# Altium PCB AFE_mezzanine.PcbDoc (part 1 of 2)
Units mm, origin at the board's own origin, x right, y up, seen from the top; angles counter-clockwise.
Board outline 100.05 x 34.55 mm, 4 copper layers (Component Side, Ground Plane, Power Plane, Solder Side), stack 1.013 mm thick; 133 components, 101 nets, 466 pads, 426 vias.
Unrouted connection lines stored in the file: 1.
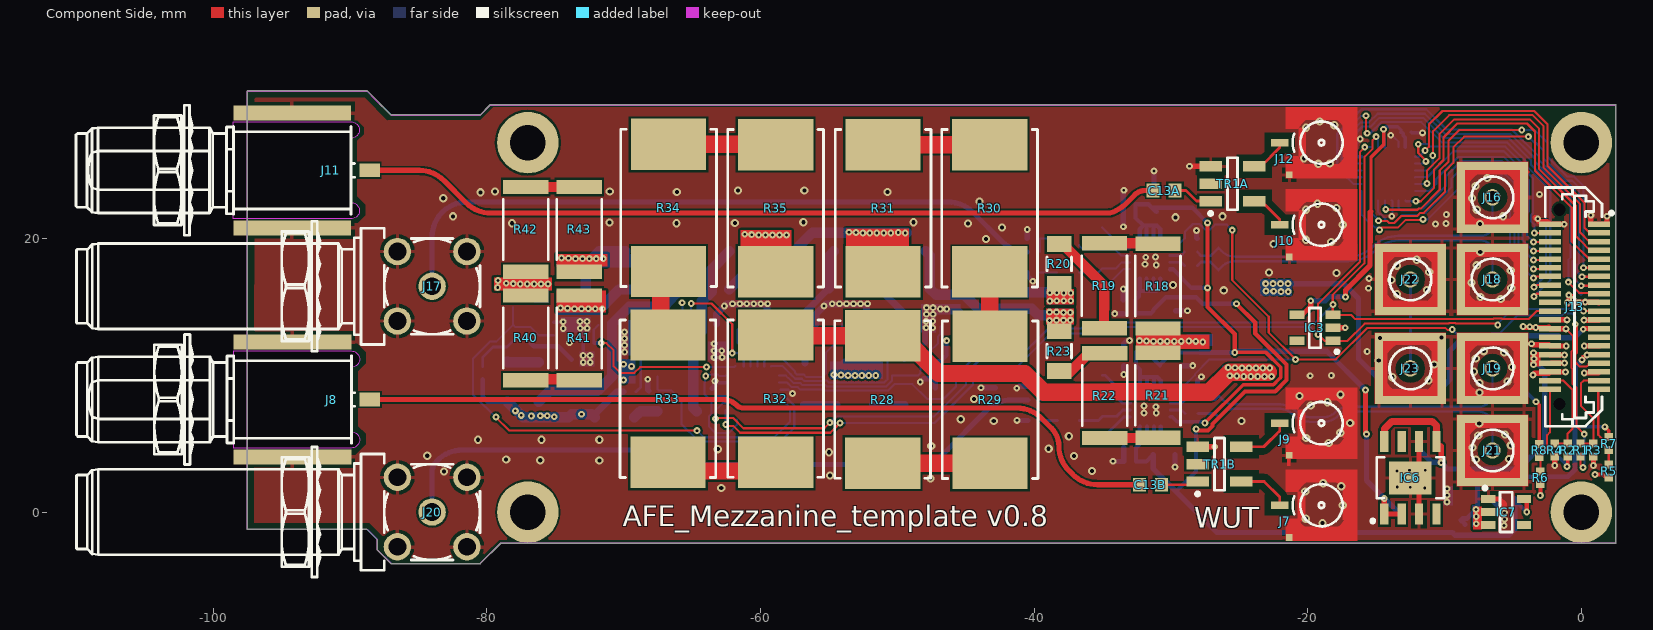
[diagram p0: Component Side view]
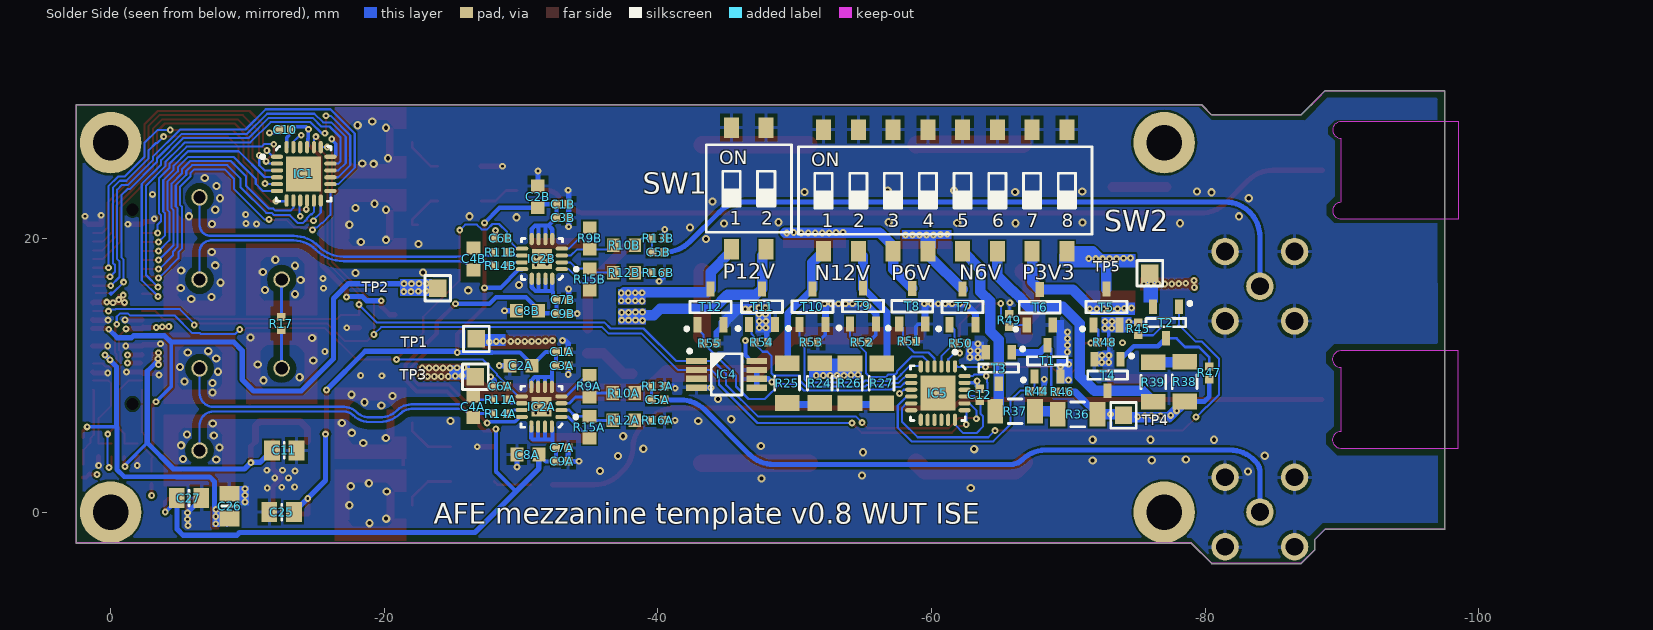
[diagram p1: Solder Side view, seen from below]
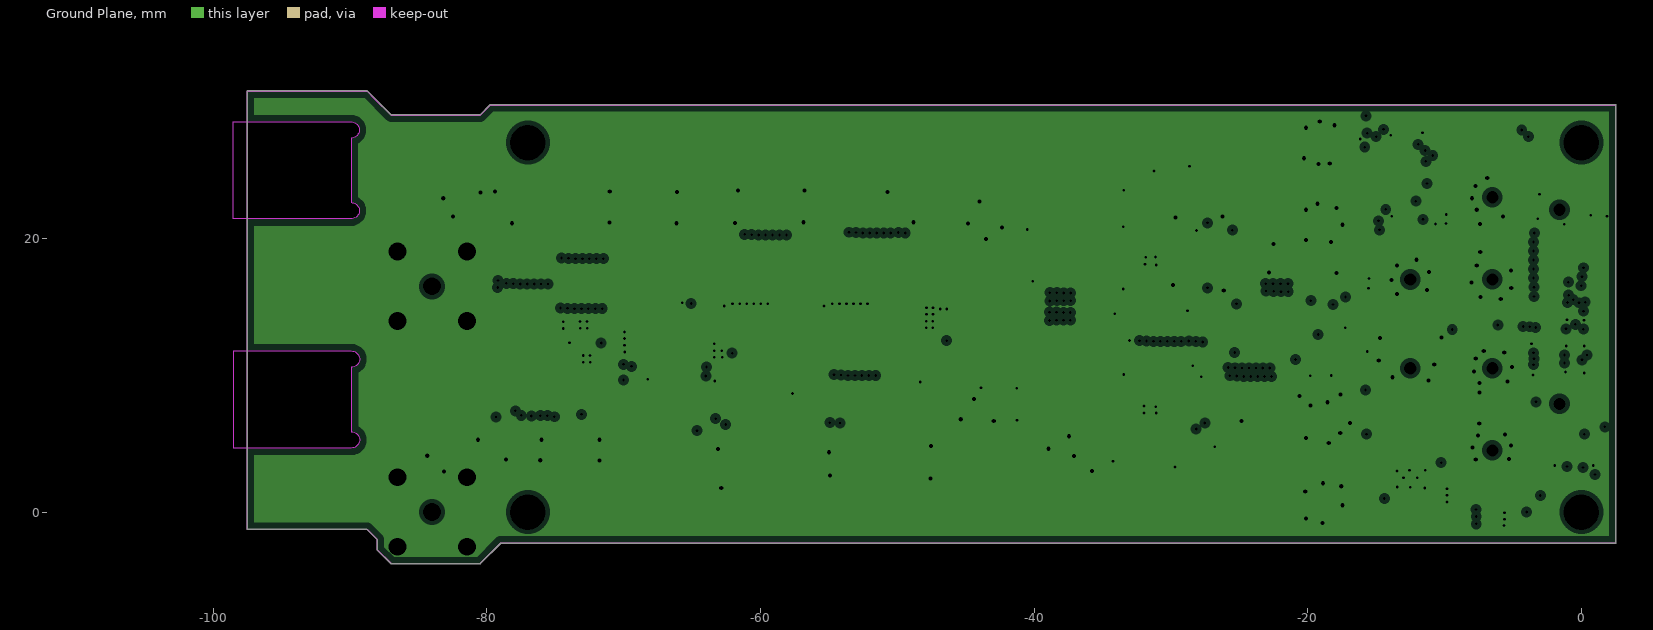
[diagram p2: Ground Plane, clearances drawn from the general rule]
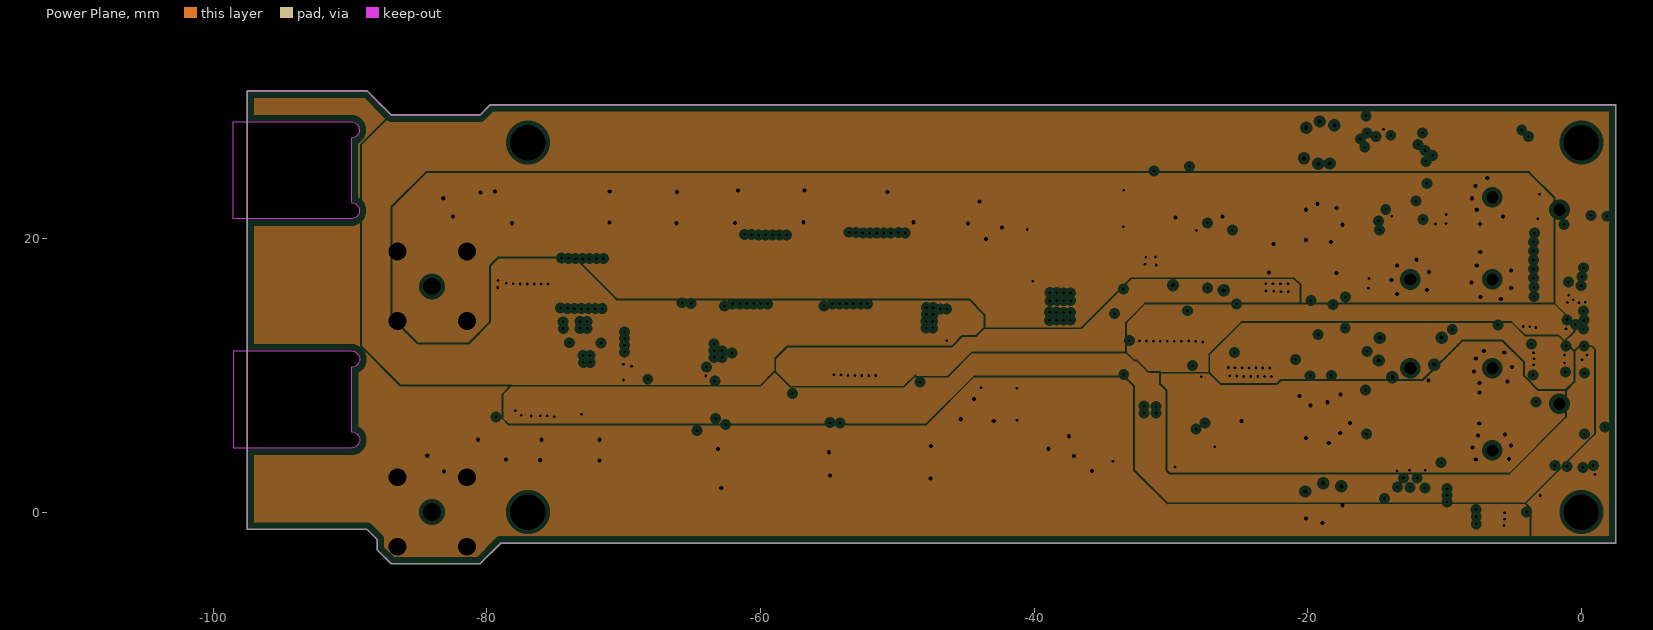
[diagram p3: Power Plane, clearances drawn from the general rule]
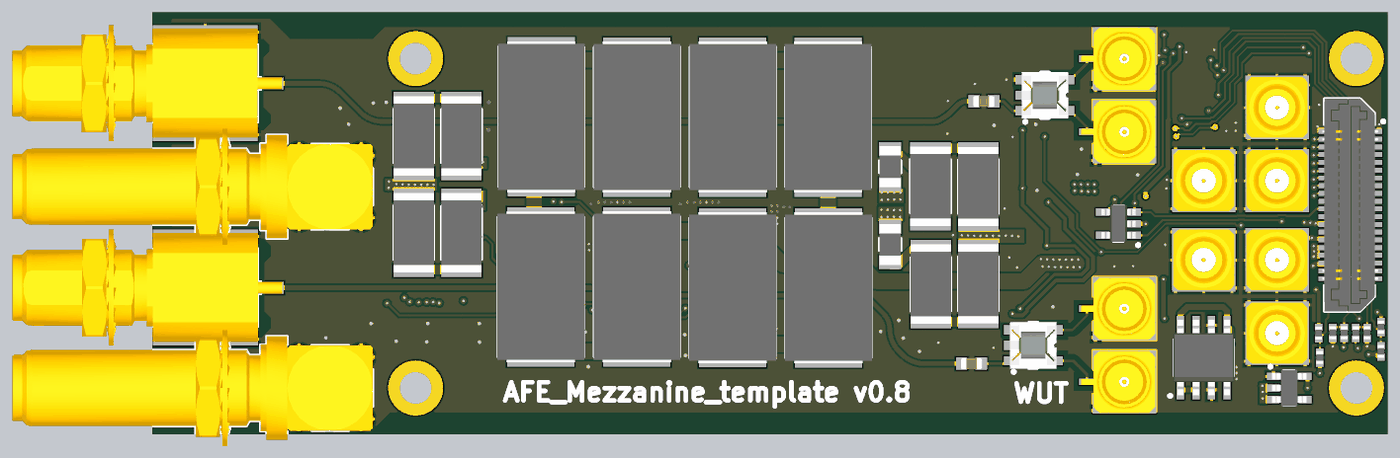
[diagram p5: 3D render of the assembled board from above, using the file's embedded part models]
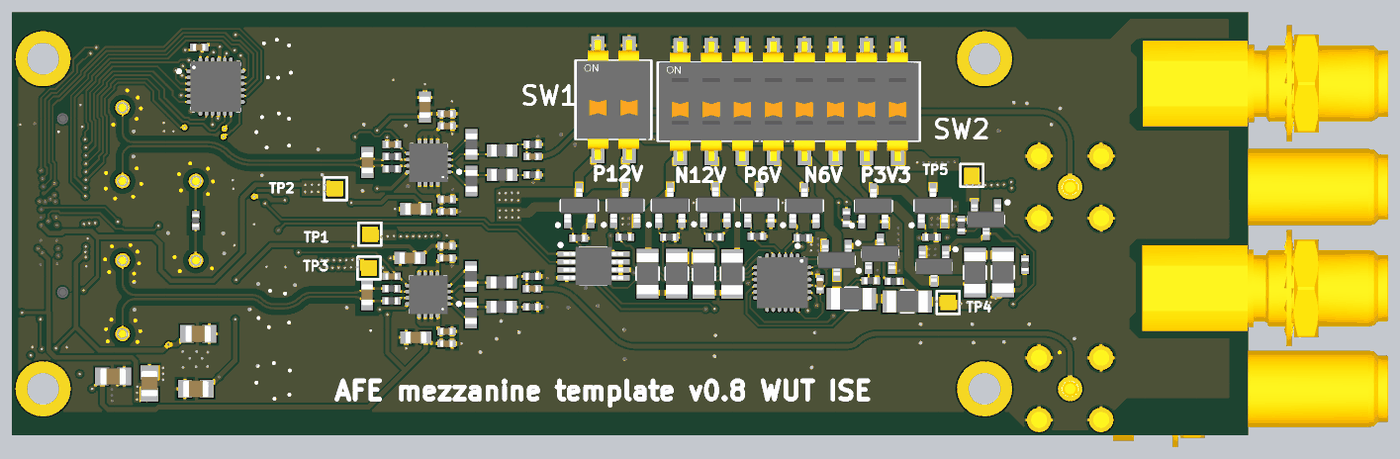
[diagram p6: 3D render of the assembled board from below, using the file's embedded part models]

## Layer stack, top to bottom
Top Solder: solder mask 0.0102, Solder Resist, Dk 3.5
Component Side: signal copper 0.035
Dielectric 1: core 0.2605, FR-4, Dk 4.8
Ground Plane: plane copper 0.035, net GND
Dielectric 3: prepreg 0.352, Dk 4.2
Power Plane: plane copper 0.035, net (Multiple Nets)
Dielectric 4: core 0.2605, Dk 4.2
Solder Side: signal copper 0.035
Bottom Solder: solder mask 0.0102, Solder Resist, Dk 3.5

## Board outline
-88.761,-1.275 -88.025,-2.011 -88.025,-2.75 ccw(c-88,-2.75) -88.018,-2.768 -87.018,-3.768 cw(c-87,-3.75) -87.018,-3.768 ccw(c-87,-3.75) -87,-3.775 -80.5,-3.775 ccw(c-80.5,-3.75) -80.482,-3.768 -78.989,-2.275 2.5,-2.275 ccw(c2.5,-2.25) 2.525,-2.25 2.525,29.75 ccw(c2.5,29.75) 2.5,29.775 -79.75,29.775 ccw(c-79.75,29.75) -79.768,29.768 cw(c-79.75,29.75) -79.768,29.768 -80.511,29.025 -86.989,29.025 -88.732,30.768 cw(c-88.75,30.75) -88.732,30.768 ccw(c-88.75,30.75) -88.75,30.775 -97.5,30.775 ccw(c-97.5,30.75) -97.525,30.75 -97.525,-1.25 ccw(c-97.5,-1.25) -97.5,-1.275

## Design rules (kind name [scope] priority, off if disabled: settings)
Clearance Clearance_1 [(InDifferentialPairClass('All Differential Pairs')) vs InNet('GND')] p1: gap=0.254 except(0.457: Arc-Poly Track-Poly SMDPad-Poly THPad-Poly)
Clearance [All] p2: gap=0.152
DiffPairsRouting [All] p1: maxlimit=0.254 minlimit=0.152 mostfreqgap=0.152 toplayer_minwidth=0.178 toplayer_maxwidth=0.381 toplayer_prefwidth=0.178 bottomlayer_minwidth=0.178 bottomlayer_maxwidth=0.381 bottomlayer_prefwidth=0.178 maxuncoupledlength=12.7
HoleSize [All] p1: absolutevalues=TRUE maxlimit=5 minlimit=0.2 maxpercent=80.000 minpercent=20.000
HoleToHoleClearance [All] p1: gap=0.2 allowstackedmicrovias=TRUE
MinimumSolderMaskSliver [All] p1 off: minsoldermaskwidth=0.05
PlaneClearance [All] p1: clearance=0.3
PlaneConnect [All] p1: planeconnectstyle=Direct reliefexpansion=0.508 reliefentries=4 reliefconductorwidth=0.254 reliefairgap=0.254
PolygonConnect PolygonConnect_pad [(InPadClass('All Pads'))] p1: connectstyle=Relief reliefconductorwidth=0.254 reliefentries=4 polygonreliefangle="90 Angle" airgapwidth=0.254
PolygonConnect [All] p2: connectstyle=Direct reliefconductorwidth=0.254 reliefentries=4 polygonreliefangle="45 Angle" airgapwidth=0.254
RoomDefinition U_ADC_channel2 [InComponentClass('U_ADC_channel2')] p1 off: confinementstyle=ConfineIn formatcopy=TRUE lockcomponents=FALSE outline -42.03,23.5 -24.03,23.5 -24.03,13.5 -42.03,13.5
RoomDefinition U_ADC_channel1 [InComponentClass('U_ADC_channel1')] p2 off: confinementstyle=ConfineIn formatcopy=TRUE lockcomponents=FALSE outline -42,12.7 -24,12.7 -24,2.7 -42,2.7
RoomDefinition U_DAC_channel2 [InComponentClass('U_DAC_channel2')] p3 off: confinementstyle=ConfineIn formatcopy=TRUE lockcomponents=FALSE outline -74.45,-3 -23.45,-3 -23.45,9 -74.45,9
RoomDefinition U_DAC_channel1 [InComponentClass('U_DAC_channel1')] p4 off: confinementstyle=ConfineIn formatcopy=TRUE lockcomponents=FALSE outline -73.5,17.5 -22.5,17.5 -22.5,29.5 -73.5,29.5
RoomDefinition AFE_mezzanine [InComponentClass('AFE_mezzanine')] p5 off: confinementstyle=ConfineIn formatcopy=TRUE lockcomponents=FALSE outline 2.5,-1.75 -24,-1.75 -24,29.75 2.5,29.75
RoutingVias [All] p1: holewidth=0.2 width=0.5 viastyle="Through Hole" minholewidth=0.2 minwidth=0.5 maxholewidth=0.711 maxwidth=1.27
SilkToSilkClearance [All] p1: silktosilkclearance=0
SilkToSolderMaskClearance SilkscreenOverComponentPads [IsPad] p1: minsilkscreentomaskgap=0 clearancetoexposedcopper=TRUE
SolderMaskExpansion [All] p1: expansion=0.102
Width [All] p1: maxlimit=2.54 minlimit=0.127 preferedwidth=0.254
22 further rules are at their usual default settings.

## Classes and differential pairs
component class AFE_mezzanine: C10 C11 C12 C25 C26 C27 IC1 IC3 IC4 IC5 IC6 IC7 J7 J8 J9 J10 J11 J12 J13 J16 J17 J18 J19 J20 J21 J22 J23 R1 R2 R3 R4 R5 R6 R7 R8 R17 R18 R19 R20 R21 R22 R23 R24 R25 R26 R27 R28 R29 R30 R31 R32 R33 R34 R35 R36 R37 R38 R39 R40 R41 R42 R43 R44 R45 R46 R47 R48 R49 R50 R51 R52 R53 R54 R55 SW1 SW2 T1 T2 T3 T4 T5 T6 T7 T8 T9 T10 T11 T12 TP1 TP2 TP3 TP4 TP5
channel class ADC_channel: U_ADC_channel1 U_ADC_channel2
channel class DAC_channel: U_DAC_channel1 U_DAC_channel2
component class U_ADC_channel1: C1A C2A C3A C4A C5A C6A C7A C8A C9A IC2A R9A R10A R11A R12A R13A R14A R15A R16A
component class U_ADC_channel2: C1B C2B C3B C4B C5B C6B C7B C8B C9B IC2B R9B R10B R11B R12B R13B R14B R15B R16B
component class U_DAC_channel1: C13A TR1A
component class U_DAC_channel2: C13B TR1B
differential pair ADC1_IN: +ADC1_IN_P -ADC1_IN_N
differential pair ADC2_IN: +ADC2_IN_P -ADC2_IN_N
differential pair DAC1_OUT: +DAC1_OUT_P -DAC1_OUT_N
differential pair DAC2_OUT: +DAC2_OUT_P -DAC2_OUT_N
differential pair LO_IN: +LO_IN_P -LO_IN_N

## Components (designator, comment, footprint, x,y, rotation, side; value= is the part's Value field where it differs from the comment)
C1A "100nF" CAPC1005X55N -33,11.7 r0 bottom (schematic designator C1)
C1B "100nF" CAPC1005X55N -33.03,22.5 r0 bottom (schematic designator C1)
C2A "10uF" CAPC1608X87N -30,10.7 r180 bottom (schematic designator C2)
C2B "10uF" CAPC1608X87N -31.231,23.043 r270 bottom (schematic designator C2)
C3A "1nF" CAPC1005X55N -33,10.7 r0 bottom (schematic designator C3)
C3B "1nF" CAPC1005X55N -33.03,21.5 r0 bottom (schematic designator C3)
C4A "10pF" CAPC1608X87N -26.5,7.7 r90 bottom (schematic designator C4)
C4B "10pF" CAPC1608X87N -26.53,18.5 r90 bottom (schematic designator C4)
C5A "100nF" CAPC1005X55N -40,8.2 r180 bottom (schematic designator C5)
C5B "100nF" CAPC1005X55N -40.03,19 r180 bottom (schematic designator C5)
C6A "100nF" CAPC1005X55N -28.5,9.2 r180 bottom (schematic designator C6)
C6B "100nF" CAPC1005X55N -28.53,20 r180 bottom (schematic designator C6)
C7A "100nF" CAPC1005X55N -33,4.7 r0 bottom (schematic designator C7)
C7B "100nF" CAPC1005X55N -33.03,15.5 r0 bottom (schematic designator C7)
C8A "10uF" CAPC1608X87N -30.5,4.2 r180 bottom (schematic designator C8)
C8B "10uF" CAPC1608X87N -30.469,14.712 r180 bottom (schematic designator C8)
C9A "1nF" CAPC1005X55N -33,3.7 r0 bottom (schematic designator C9)
C9B "1nF" CAPC1005X55N -33.03,14.5 r0 bottom (schematic designator C9)
C10 "100nF" CAPC1005X55N -12.765,27.945 r180 bottom
C11 "1uF" CAPC2012X140N -12.689,4.501 r0 bottom
C12 "100nF" CAPC1005X55N -63.54,8.571 r270 bottom
C13A "100nF" CAPC1608X87N -30.5,23.5 r0 top (schematic designator C13)
C13B "100nF" CAPC1608X87N -31.5,2 r0 top (schematic designator C13)
C25 "1uF" CAPC2012X140N -12.5,0 r180 bottom
C26 "1uF" CAPC2012X140N -8.701,0.437 r270 bottom
C27 "1uF" CAPC2012X140N -5.73,1.02 r0 bottom
IC1 "TCA9539RTWR" QFN50P400X400X80-25N-S255 -14.112,24.719 r180 bottom
IC2A "ADA4927-1YCPZ-R2" QFN50P300X300X100-17N-S145 -31.5,7.7 r0 bottom (schematic designator IC2)
IC2B "ADA4927-1YCPZ-R2" QFN50P300X300X100-17N-S145 -31.53,18.5 r0 bottom (schematic designator IC2)
IC3 "24AA02E48T-I/OT" SOT95P280X145-5N -19.471,13.467 r180 top
IC4 "LM75AIMM/NOPB" SOP65P490X109-8N -45.023,10.063 r180 bottom
IC5 "TCA9539RTWR" QFN50P400X400X80-25N-S255 -60.467,8.692 r270 bottom
IC6 "ADP7102ARDZ-5.0-R7" SOIC127P600X175-9N-R241X309 -12.5,2.5 r90 top
IC7 "ADP7182AUJZ-5.0-R7" SOT95P280X90-5N -5.5,0 r0 top
J7 "SMP" MOLEX_85305-0232 -19,0.5 r90 top locked
J8 "SMA" TELEGARTNER_J01151A0451 -88.55,8.224 r180 top
J9 "SMP" MOLEX_85305-0232 -19,6.5 r90 top locked
J10 "SMP" MOLEX_85305-0232 -19,21 r90 top locked
J11 "SMA" TELEGARTNER_J01151A0451 -88.575,24.975 r180 top
J12 "SMP" MOLEX_85305-0232 -19,27 r90 top locked
J13 "Familly" SAMTEC_LSS-120-03-L-DV-A -0.5,15 r90 top
J16 "SMP" AMPHENOL_SMP-MSLD-PCT-10 -6.5,23 r0 top
J17 "SMA" TELEGARTNER_J01151A0921 -84,16.5 r0 top
J18 "SMP" AMPHENOL_SMP-MSLD-PCT-10 -6.5,17 r0 top
J19 "SMP" AMPHENOL_SMP-MSLD-PCT-10 -6.5,10.5 r0 top
J20 "SMA" TELEGARTNER_J01151A0921 -84,0 r0 top
J21 "SMP" AMPHENOL_SMP-MSLD-PCT-10 -6.5,4.5 r0 top
J22 "SMP" AMPHENOL_SMP-MSLD-PCT-10 -12.5,16.997 r0 top locked
J23 "SMP" AMPHENOL_SMP-MSLD-PCT-10 -12.5,10.5 r0 top
R1 "10k" RESC1005X40N -0.065,4.526 r270 top
R2 "10k" RESC1005X40N -1.005,4.526 r270 top
R3 "1k" RESC1005X40N 0.874,4.526 r90 top
R4 "1k" RESC1005X40N -1.945,4.526 r90 top
R5 "1k" RESC1005X40N 2,3 r90 top
R6 "1k" RESC1005X40N -3,2.5 r90 top
R7 "10k" RESC1005X40N 2,5 r90 top
R8 "10k" RESC1005X40N -3.088,4.501 r90 top
R9A "332" RESC1608X55N -35,9.2 r90 bottom (schematic designator R9)
R9B "332" RESC1608X55N -35.03,20 r90 bottom (schematic designator R9)
R10A "332" RESC1608X55N -37.5,8.7 r0 bottom (schematic designator R10)
R10B "332" RESC1608X55N -37.53,19.5 r0 bottom (schematic designator R10)
R11A "49R9" RESC1005X40N -28.5,8.2 r180 bottom (schematic designator R11)
R11B "49R9" RESC1005X40N -28.53,19 r180 bottom (schematic designator R11)
R12A "332" RESC1608X55N -37.5,6.7 r0 bottom (schematic designator R12)
R12B "332" RESC1608X55N -37.53,17.5 r0 bottom (schematic designator R12)
R13A "56" RESC1005X40N -40,9.2 r0 bottom (schematic designator R13)
R13B "56" RESC1005X40N -40.03,20 r0 bottom (schematic designator R13)
R14A "49R9" RESC1005X40N -28.5,7.2 r180 bottom (schematic designator R14)
R14B "49R9" RESC1005X40N -28.53,18 r180 bottom (schematic designator R14)
R15A "332" RESC1608X55N -35,6.2 r270 bottom (schematic designator R15)
R15B "332" RESC1608X55N -35.03,17 r270 bottom (schematic designator R15)
R16A "56" RESC1005X40N -40,6.7 r0 bottom (schematic designator R16)
R16B "56" RESC1005X40N -40.03,17.5 r0 bottom (schematic designator R16)
R17 "100" RESC1005X40N -12.486,13.772 r90 bottom
R18 "56" RESC6331X70N -30.952,16.515 r90 top
R19 "56" RESC6331X70N -34.863,16.54 r270 top
R20 "8R2" RESC3216X65N -38.165,18.141 r270 top
R21 "56" RESC6331X70N -30.952,8.538 r270 top
R22 "56" RESC6331X70N -34.838,8.513 r90 top
R23 "8R2" RESC3216X65N -38.165,11.765 r90 top
R24 "120" RESC3216X65N -51.831,9.428 r270 bottom
R25 "120" RESC3216X65N -49.443,9.428 r90 bottom
R26 "120" RESC3216X65N -54.04,9.405 r270 bottom
R27 "120" RESC3216X65N -56.352,9.403 r90 bottom
R28 "2" RESM11670X449N -51.069,8.224 r270 top
R29 "2" RESM11670X449N -43.22,8.209 r90 top
R30 "2" RESM11670X449N -43.245,22.205 r90 top
R31 "2" RESM11670X449N -51.043,22.205 r270 top
R32 "2" RESM11670X449N -58.892,8.285 r270 top
R33 "2" RESM11670X449N -66.766,8.284 r90 top
R34 "2" RESM11670X449N -66.715,22.23 r90 top
R35 "2" RESM11670X449N -58.892,22.205 r270 top
R36 "62" RESC3216X65N -70.677,7.142 r0 bottom
R37 "62" RESC3216X65N -66.105,7.371 r0 bottom
R38 "62" RESC3216X65N -78.501,9.53 r90 bottom
R39 "62" RESC3216X65N -76.215,9.505 r270 bottom
R40 "3R3" RESC6331X70N -77.154,12.729 r270 top
R41 "3R3" RESC6331X70N -73.243,12.729 r90 top
R42 "3R3" RESC6331X70N -77.154,20.655 r90 top
R43 "3R3" RESC6331X70N -73.243,20.655 r270 top
R44 "10k" RESC1005X40N -67.68,8.844 r180 bottom
R45 "10k" RESC1005X40N -75.097,13.391 r90 bottom
R46 "10k" RESC1005X40N -69.56,8.793 r180 bottom
R47 "10k" RESC1005X40N -80.304,10.165 r270 bottom
R48 "10k" RESC1005X40N -72.659,12.4 r180 bottom
R49 "10k" RESC1005X40N -65.699,14 r90 bottom
R50 "10k" RESC1005X40N -62.143,12.349 r180 bottom
R51 "10k" RESC1005X40N -58.384,12.476 r180 bottom
R52 "10k" RESC1005X40N -54.929,12.426 r180 bottom
R53 "10k" RESC1005X40N -51.221,12.4 r180 bottom
R54 "10k" RESC1005X40N -47.589,12.4 r180 bottom
R55 "10k" RESC1005X40N -43.804,12.324 r180 bottom
SW1 "Switch" SW_OMRON_A6S-2102-H -46.649,23.647 r90 bottom
SW2 "Switch" SW_OMRON_A6S-8102-H -61,23.5 r90 bottom
T1 "IRLML6402PBF" SOT95P237X112-3N -68.468,11.054 r90 bottom
T2 "IRLML6402PBF" SOT95P237X112-3N -77.129,13.848 r270 bottom
T3 "IRLML6402PBF" SOT95P237X112-3N -64.912,10.521 r270 bottom
T4 "IRLML6402PBF" SOT95P237X112-3N -72.872,10.006 r270 bottom
T5 "DMN2020LSN-7" SOT95P285X140-3N -72.786,14.986 r90 bottom
T6 "DMN2020LSN-7" SOT95P285X140-3N -67.909,14.966 r90 bottom
T7 "DMN2020LSN-7" SOT95P285X140-3N -62.27,14.991 r90 bottom
T8 "DMN2020LSN-7" SOT95P285X140-3N -58.587,15.042 r90 bottom
T9 "DMN2020LSN-7" SOT95P285X140-3N -54.991,15.06 r90 bottom
T10 "DMN2020LSN-7" SOT95P285X140-3N -51.297,15.016 r90 bottom
T11 "DMN2020LSN-7" SOT95P285X140-3N -47.614,15.016 r90 bottom
T12 "DMN2020LSN-7" SOT95P285X140-3N -43.855,14.991 r90 bottom
TP1 "Test Point" TPS127 -26.735,12.654 r180 bottom
TP2 "Test Point" TPS127 -23.916,16.363 r180 bottom
TP3 "Test Point" TPS127 -26.659,9.886 r180 bottom
TP4 "Test Point" TPS127 -74.03,7.066 r180 bottom
TP5 "Test Point" TPS127 -75.961,17.455 r180 bottom
TR1A "1:1" XFMR_MINI-CIRCUITS_AT224 -25.5,24 r90 top (schematic designator TR1)
TR1B "1:1" XFMR_MINI-CIRCUITS_AT224 -26.45,3.5 r90 top (schematic designator TR1)

## Footprints (in the part's own frame and the unit in brackets; to place one, negate y for a bottom-side part, rotate by r counter-clockwise, add the part's x,y. Pads: shape width x height; smd on the part's side, far side on the other; paste and mask are expansions set on the pad)
AMPHENOL_SMP-MSLD-PCT-10 [mm] "50 Ohm RF Connector, SMP Straight PCB Jack, Limited Detent, Surface Mount with Thru-Hole Contact"
  round 1.2 hole 0.9: 1(0,0)
  round 1.2 smd: 1(0,0)
  rect 0.6x5.2 smd: 2(-2.3,0) 2(2.3,0)
  rect 5.2x0.6 smd: 2(0,-2.3) 2(0,2.3)
  Component Side region: -2.6,-2.6 0,-2.6 0,-2 -0.868,-1.802 -1.564,-1.247 -1.95,-0.445 -1.95,0.445 -1.564,1.247 -0.868,1.802 0,2 0,2 0,2.6 -2.6,2.6
  Component Side region: 0,-2.6 2.6,-2.6 2.6,2.6 0,2.6 0,2 0.868,1.802 1.564,1.247 1.95,0.445 1.95,-0.445 1.564,-1.247 0.868,-1.802 0,-2 0,-2
  silkscreen extent -1.52,-1.52 1.53,1.52, body extent -2.5,-2.5 2.5,2.5, height 4.09
CAPC1005X55N [mm] "Chip Capacitor, Body 1.0x0.55mm, IPC Medium Density"
  rect 0.62x0.62 smd: 1(-0.45,0) 2(0.45,0)
  body extent -0.52,-0.27 0.53,0.28, height 0.55
CAPC1608X87N [mm] "Chip Capacitor, Body 1.6x0.8mm IPC Medium Density"
  rect 0.95x1 smd: 1(-0.8,0) 2(0.8,0)
  body extent -0.87,-0.47 0.88,0.48, height 0.87
CAPC2012X140N [mm] "Chip Capacitor, Body 2.0x1.25mm, IPC Medium Density"
  rect 1.15x1.45 smd: 1(-0.9,0) 2(0.9,0)
  silkscreen extent 0,-0.58 0,0.58, body extent -1.05,-0.67 1.05,0.68, height 1.3
MOLEX_85305-0232 [mm] "50 Ohms, SMP Surface Mount Plug, Limited Detent"
  rect 0.54x1.3 smd: 1(0,3.05)
  rect 0.5x0.5 smd paste-0.25 mask-0.25: 2(-2.35,2.35)
  Component Side region: -2.6,-2.6 -2.6,2.6 -1,2.6 -1,1.732 -1.732,1 -2,0 -1.732,-1 -1,-1.732 0,-2 1,-1.732 1.732,-1 2,0 1.732,1 1,1.732 1,1.732 1,2.6 2.6,2.6 2.6,-2.6
  silkscreen extent -1.55,-1.55 1.55,2.1, body extent -2.54,-2.54 2.54,3.54, height 4.1
QFN50P300X300X100-17N-S145 [mm] "QFN,0.50mm Pitch, Square; 4 Pin X 4 Pin, 3mm X 3mm X 1.00mm H Body (w/Thermal Tab 1.45 X 1.45mm), IPC Medium Density"
  oval 0.9x0.3 smd: 1(-1.45,0.75) 2(-1.45,0.25) 3(-1.45,-0.25) 4(-1.45,-0.75) 9(1.45,-0.75) 10(1.45,-0.25) 11(1.45,0.25) 12(1.45,0.75)
  oval 0.3x0.9 smd: 5(-0.75,-1.45) 6(-0.25,-1.45) 7(0.25,-1.45) 8(0.75,-1.45) 13(0.75,1.45) 14(0.25,1.45) 15(-0.25,1.45) 16(-0.75,1.45)
  rect 1.45x1.45 smd: 17(0,0)
  silkscreen extent -2.62,-1.5 1.5,1.5, body extent -1.57,-1.57 1.58,1.58, height 1
QFN50P400X400X80-25N-S255 [mm] "QFN, 0.50mm Pitch, Square; 6 Pin X 6 Pin, 4mm X 4mm Body (w/Thermal Tab 2.55 X 2.55 mm), IPC Medium Density"
  oval 0.9x0.3 smd: 1(-1.95,1.25) 2(-1.95,0.75) 3(-1.95,0.25) 4(-1.95,-0.25) 5(-1.95,-0.75) 6(-1.95,-1.25) 13(1.95,-1.25) 14(1.95,-0.75) 15(1.95,-0.25) 16(1.95,0.25) 17(1.95,0.75) 18(1.95,1.25)
  oval 0.3x0.9 smd: 7(-1.25,-1.95) 8(-0.75,-1.95) 9(-0.25,-1.95) 10(0.25,-1.95) 11(0.75,-1.95) 12(1.25,-1.95) 19(1.25,1.95) 20(0.75,1.95) 21(0.25,1.95) 22(-0.25,1.95) 23(-0.75,1.95) 24(-1.25,1.95)
  rect 2.55x2.55 smd: 25(0,0)
  silkscreen extent -3.13,-2 2,2, body extent -2.07,-2.07 2.08,2.08, height 0.8
RESC1005X40N [mm] "Chip Resistor, EIA 0402, Metric 1005, Body 1.0x0.5mm, IPC Medium Density"
  rect 0.58x0.62 smd: 1(-0.47,0) 2(0.47,0)
  body extent -0.52,-0.27 0.53,0.28, height 0.4
RESC1608X55N [mm] "Chip Resistor, EIA 0603, Metric 1608, Body 1.6x0.8mm, IPC Medium Density"
  rect 0.9x1 smd: 1(-0.8,0) 2(0.8,0)
  body extent -0.87,-0.47 0.88,0.48, height 0.55
RESC3216X65N [mm] "Chip Resistor, EIA 1206, Metric 3216, Body 3.2x1.6mm, IPC Medium Density"
  rect 1.15x1.8 smd: 1(-1.45,0) 2(1.45,0)
  silkscreen extent -0.5,-0.9 0.5,0.9, body extent -1.67,-0.87 1.68,0.88, height 0.65
RESC6331X70N [mm] "Chip Resistor, EIA 2512, Metric 6331, 2-Leads, Body 6.3x3.1mm, IPC Medium Density"
  rect 1.05x3.3 smd: 1(-3.1,0) 2(3.1,0)
  silkscreen extent -2.2,-1.65 2.2,1.65, body extent -3.25,-1.65 3.25,1.65, height 0.7
RESM11670X449N [mm] "Resistor, Molded Body; 11.56mm L X 6.98mm W X 4.49mm H, IPC Medium Density"
  rect 3.75x5.5 smd: 1(-4.65,0) 2(4.65,0)
  silkscreen extent -5.75,-3.5 5.75,3.5, body extent -6.19,-3.55 6.19,3.55, height 4.49
SAMTEC_LSS-120-03-L-DV-A [mm] "40 Contacts, Pitch 0.635mm, Razor Beam LSS Vertical High Speed Hermaphroditic Strip (Lead Style 5.49mm)"
  rect 0.4x1.6 smd: 1(6.032,-1.8) 2(6.032,1.8) 3(5.397,-1.8) 4(5.397,1.8) 5(4.763,-1.8) 6(4.763,1.8) 7(4.127,-1.8) 8(4.127,1.8) 9(3.492,-1.8) 10(3.492,1.8) 11(2.857,-1.8) 12(2.857,1.8) 13(2.222,-1.8) 14(2.222,1.8) 15(1.588,-1.8) 16(1.587,1.8) 17(0.953,-1.8) 18(0.952,1.8) 19(0.318,-1.8) 20(0.317,1.8) 21(-0.317,-1.8) 22(-0.318,1.8) 23(-0.952,-1.8) 24(-0.953,1.8) 25(-1.587,-1.8) 26(-1.588,1.8) 27(-2.222,-1.8) 28(-2.222,1.8) 29(-2.857,-1.8) 30(-2.857,1.8) 31(-3.492,-1.8) 32(-3.492,1.8) 33(-4.127,-1.8) 34(-4.127,1.8) 35(-4.763,-1.8) 36(-4.763,1.8) 37(-5.397,-1.8) 38(-5.397,1.8) 39(-6.032,-1.8) 40(-6.032,1.8)
  round 0.5 hole 0.9 unplated mask+0.2: P1(-7.1,1.1) P2(7.1,1.1)
  silkscreen extent -8.72,-2.83 8.72,2.14, body extent -8.72,-2.3 8.73,2.3, height 5.3
SOIC127P600X175-9N-R241X309 [mm] "SOIC 8, Pitch 1.27mm - Body 3.9x4.9mm, (w/thermal tab 2.41mm X 3.098mm), IPC Medium Density"
  rect 1.55x0.6 smd: 1(-2.65,1.905) 2(-2.65,0.635) 3(-2.65,-0.635) 4(-2.65,-1.905) 5(2.65,-1.905) 6(2.65,-0.635) 7(2.65,0.635) 8(2.65,1.905)
  rect 2.41x3.098 smd: 9(0,0)
  silkscreen extent -3.27,-2.45 1.5,2.87, body extent -3.1,-2.5 3.1,2.5, height 1.75
SOP65P490X109-8N [mm] "SOP, 0.65mm pitch; 8 pin,3.00mm W X 3.00mm L X 1.09mm H bodyI, PC Medium Density"
  rect 1.5x0.45 smd: 1(-2.2,0.975) 2(-2.2,0.325) 3(-2.2,-0.325) 4(-2.2,-0.975) 5(2.2,-0.975) 6(2.2,-0.325) 7(2.2,0.325) 8(2.2,0.975)
  silkscreen extent -2.83,-1.5 1.12,1.82, body extent -2.45,-1.55 2.45,1.55, height 1.09
SOT95P237X112-3N [mm] "SOT, 0.95mm, pitch; 3 pin,1.30mm W X 2.92mm L X 1.12mm H body, IPC Medium Density"
  rect 1.05x0.6 smd: 1(-1.15,0.95) 2(-1.15,-0.95) 3(1.15,0)
  silkscreen extent -1.52,-1.45 0.3,1.88, body extent -1.25,-1.5 1.25,1.5, height 1.1
SOT95P280X90-5N [mm] "SOT, 0.95mm Pitch; 5 Pin, 1.60mm W X 2.90mm L X 0.90mm H body, IPC Medium"
  rect 1.05x0.6 smd: 1(-1.3,0.95) 2(-1.3,0) 3(-1.3,-0.95) 4(1.3,-0.95) 5(1.3,0.95)
  silkscreen extent -1.67,-1.45 0.45,1.87, body extent -1.4,-1.5 1.4,1.5, height 0.9
SOT95P280X145-5N [mm] "SOT, 0.95mm pitch; 5 pin, 1.60mm W X 2.90mm L X 1.45mm H body, IPC Medium Density"
  rect 1.1x0.6 smd: 1(-1.3,0.95) 2(-1.3,0) 3(-1.3,-0.95) 4(1.3,-0.95) 5(1.3,0.95)
  silkscreen extent -1.73,-1.45 0.43,1.87, body extent -1.4,-1.5 1.4,1.5, height 1.45
SOT95P285X140-3N [mm] "SOT23, 0.95mm Pitch; 3 Pin, 1.6mm W X 3mm L X 1.4mm H Body, IPC Medium Density"
  rect 1.1x0.6 smd: 1(-1.3,0.95) 2(-1.3,-0.95) 3(1.3,0)
  silkscreen extent -1.72,-1.5 0.43,1.88, body extent -1.4,-1.5 1.4,1.5, height 1.4
SW_OMRON_A6S-2102-H [mm] "Pitch 2.54mm, Body 6.2x6.4mm, 2 Ways SPST Surface-Mounting DIP Switch, OMRON A6S-H"
  rect 1.5x1.1 smd: 1(-4.45,1.27) 2(-4.45,-1.27) 3(4.45,-1.27) 4(4.45,1.27)
  silkscreen extent -3.2,-3.11 3.2,3.11, body extent -4.9,-3.01 4.9,3.01, height 3.97
SW_OMRON_A6S-8102-H [mm] "Pitch 2.54mm, Body 21.5x6.4mm, 8 Ways SPST Surface-Mounting DIP Switch, OMRON A6S-H"
  rect 1.5x1.1 smd: 1(-4.45,8.89) 2(-4.45,6.35) 3(-4.45,3.81) 4(-4.45,1.27) 5(-4.45,-1.27) 6(-4.45,-3.81) 7(-4.45,-6.35) 8(-4.45,-8.89) 9(4.45,-8.89) 10(4.45,-6.35) 11(4.45,-3.81) 12(4.45,-1.27) 13(4.45,1.27) 14(4.45,3.81) 15(4.45,6.35) 16(4.45,8.89)
  silkscreen extent -3.2,-10.73 3.2,10.73, body extent -4.9,-10.63 4.9,10.63, height 3.85
TELEGARTNER_J01151A0451 [mm] "SMA 50 ohm Edge Mount Bulkhead Jack Receptacle"
  rect 1.5x1 smd: 1(0,0)
  rect 8.6x1.1 smd: 2(5.65,4.2) 2(5.65,-4.2)
  Keep-Out Layer board cut-out: 1.35,-3.55 1.09,-3.491 0.881,-3.324 0.765,-3.084 0.765,-2.816 0.881,-2.576 1.09,-2.409 1.35,-2.35 1.35,-2.35 1.35,2.35 1.09,2.409 0.881,2.576 0.765,2.816 0.765,3.084 0.881,3.324 1.09,3.491 1.35,3.55 1.35,3.55 9.95,3.55 9.95,-3.55
  silkscreen extent 1.1,-4.75 21.45,4.75, body extent -0.65,-4.75 21.45,4.75, height 5.25
TELEGARTNER_J01151A0921 [mm] "50 Ohm SMA Right Angle PCB Jack"
  round 2 hole 1.3: 1(0,0) 2(-2.54,-2.54) 2(-2.54,2.54) 2(2.54,-2.54) 2(2.54,2.54)
  silkscreen extent -26,-4.75 3.5,4.75, body extent -26,-4.75 3.5,4.75, height 11.15
TPS127 [mm] "1.27 x  1.27mm SMD Test Point Area"
  rect 1.27x1.27 smd paste-1.27: 1(0,0)
  silkscreen extent -0.94,-0.94 0.94,0.94
XFMR_MINI-CIRCUITS_AT224 [mm] "MINI-CIRCUITS RF Transformer, Case AT224 - Body 3.81X3.81mm"
  rect 0.76x1.65 smd: 1(-1.27,1.59) 2(0,1.59) 3(1.27,1.59) 4(1.27,-1.59) 6(-1.27,-1.59)
  silkscreen extent -2.3,-0.37 1.91,1.72, body extent -1.9,-1.9 1.91,1.91, height 3.81

## Part data
C1A C1B C5A C5B C6A C6B C7A C7B C10 C12: library part CC0402_100NF_16V_10%_X5R, "Non-polarised capacitor"
C2A C2B C8A C8B: library part CC0603_10UF_6.3V_20%_X5R, "Non-polarised capacitor"
C3A C3B C9A C9B: library part CC0402_1NF_50V_10%_X7R, "Non-polarised capacitor"
C4A C4B: library part CC0603_10PF_50V_5%_NP0, "Non-polarised capacitor"
C11 C25 C26 C27: library part CC0805_1UF_35V_20%_X7R, "Non-polarised capacitor"
C13A C13B: library part CC0603_100NF_50V_10%_X7R, "Non-polarised capacitor"
IC1 IC5: "Low-Voltage 16-Bit I2C and SMBus I/O Expander"
IC2A IC2B: "Ultralow Distortion Current Feedback Differential ADC Driver"
IC3: "1.7V-5.5V, 2K I2C Serial EEPROM With EUI-48 Node Identity"
IC4: "Digital Temperature Sensor and Thermal Watchdog with Two-Wire Interface"
IC6: "300 mA, Low Noise, CMOS LDO Linear Regulator"
IC7: "–5V, 200 mA, Low Noise, Linear Regulator"
J7 J9 J10 J12: library part MOLEX_85305-0232
J8 J11: library part TELEGARTNER_J01151A0451
J13: library part SAMTEC_LSS-120-03-L-DV-A, "Connector 40 Hermaphroditic"
J16 J18 J19 J21 J22 J23: library part AMPHENOL_SMP-MSLD-PCT-10
J17 J20: library part TELEGARTNER_J01151A0921
R1 R2 R7 R8 R44 R45 R46 R47 R48 R49 R50 R51 R52 R53 R54 R55: library part R0402_10K_1%_0.0625W_100PPM, "Resistor - 1%"
R3 R4 R5 R6: library part R0402_1K_1%_0.0625W_100PPM, "Resistor - 1%"
R9A R9B R10A R10B R12A R12B R15A R15B: library part R0603_332R_0.1%_0.063W_10PPM, "Resistor - 0.1%"
R11A R11B R14A R14B: library part R0402_49R9_1%_0.0625W_100PPM, "Resistor - 1%"
R13A R13B R16A R16B: library part R0402_56R_1%_0.0625W_100PPM, "Resistor - 1%"
R17: library part R0402_100R_1%_0.0625W_100PPM, "Resistor - 1%"
R18 R19 R21 R22: library part R2512_56R_5%_1W_200PPM, "Resistor - 5%"
R20 R23: library part R1206_8R2_1%_0.25W_200PPM, "Resistor - 1%"
R24 R25 R26 R27: library part R1206_120R_1%_0.25W_100PPM, "Resistor - 1%"
R28 R29 R30 R31 R32 R33 R34 R35: library part R4527_2R_1%_2W_50PPM, "Resistor - 1%"
R36 R37 R38 R39: library part R1206_62R_1%_0.25W_100PPM, "Resistor - 1%"
R40 R41 R42 R43: library part R2512_3R3_1%_1W_200PPM, "Resistor - 1%"
SW1: library part SW_OMRON_A6S-2102-H, "2 Ways SPST DIP Switch"
SW2: library part SW_OMRON_A6S-8102-H, "8 Ways SPST DIP Switch"
T1 T2 T3 T4: "P-CHANNEL MOSFET WITH ZENER DIODE"
T5 T6 T7 T8 T9 T10 T11 T12: "20V, 6.9A, N-Channel Enhancement Mode MOSFET"
TP1 TP2 TP3 TP4 TP5: library part SMD_PAD_1.27X1.27MM
TR1A TR1B: library part XFMR_MINI-CIRCUITS_TC1-1-13M+, "50 Ohms 4.5 To 3000MHz RF Transformers"

## Free pads (board coordinates)
  round 4.5 hole 2.6: 0(-77,27) 0(0,27) 1(-77,0) 1(0,0)

## Via types
v1: diameter 0.5, hole 0.2, Component Side to Solder Side, tented both sides, 307 vias
v2: diameter 0.6, hole 0.3, Component Side to Solder Side, tented both sides, 114 vias
v3: diameter 0.5, hole 0.2, Component Side to Solder Side, 5 vias

## Nets (pads, with @x,y where several pads share a name; then routed paths per layer and width w, separated by ;. In a path a pad name is that pad's centre, name@x,y a point inside that pad or via, vN(x,y) a via of type N, cw(c..) or ccw(c..) an arc to the next point about the centre after c; other vN are vias at no path point)
ADC1_IN_N: C4B.1 J18.1 R14B.1 | length 25
  Solder Side w0.178: C4B.1@-26.53,17.7 C4B.1@-26.328,17.902 ; C4B.1@-26.327,17.903 cw(c-25.283,16.857) -25.283,18.335 -17.027,18.335 ccw(c-17.027,21.205) -14.997,19.176 cw(c-13.366,17.544) -14.996,19.177 cw(c-13.366,17.544) -13.366,19.851 -7.321,19.851 cw(c-7.321,19.031) -6.5,19.031 J18.1@-6.5,17.017
  Solder Side w0.203: R14B.1@-28.06,18 -27.792,18.268 -27.098,18.268 C4B.1@-26.53,17.7
ADC1_IN_P: C4B.2 J16.1 R11B.1 | length 25
  Solder Side w0.178: C4B.2@-26.53,19.3 C4B.2@-26.328,19.098 ; C4B.2@-26.327,19.097 ccw(c-25.283,20.143) -25.283,18.665 -17.027,18.665 ccw(c-17.027,21.205) -15.231,19.409 -15.202,19.438 cw(c-13.406,17.642) -13.406,20.182 -7.321,20.182 ccw(c-7.321,21.002) -6.5,21.002 J16.1@-6.5,23.017
  Solder Side w0.203: R11B.1@-28.06,19 -27.785,18.725 -27.105,18.725 C4B.2@-26.53,19.3
ADC2_IN_N: C4A.1 J21.1 R14A.1 | length 24.7
  Solder Side w0.178: C4A.1@-26.5,6.9 -26.166,7.234 cw(c-25.44,6.509) -25.44,7.535 -21.962,7.535 cw(c-21.962,6.455) -21.198,7.219 ccw(c-19.665,8.752) -19.665,6.584 -18.928,6.584 ccw(c-18.928,8.301) -17.714,7.087 cw(c-17.074,6.448) -17.074,7.351 -7.533,7.351 cw(c-7.533,6.318) -6.5,6.318 J21.1@-6.5,4.517
  Solder Side w0.203: R14A.1@-28.03,7.2 -26.8,7.2 C4A.1@-26.5,6.9
ADC2_IN_P: C4A.2 J19.1 R11A.1 | length 24.7
  Solder Side w0.178: C4A.2@-26.5,8.5 -26.166,8.166 ccw(c-25.44,8.891) -25.44,7.865 -21.962,7.865 cw(c-21.962,6.455) -20.965,7.452 ccw(c-19.665,8.752) -19.665,6.914 -18.928,6.914 ccw(c-18.928,8.301) -17.947,7.32 cw(c-17.074,6.448) -17.074,7.682 -7.533,7.682 ccw(c-7.533,8.715) -6.5,8.715 J19.1@-6.5,10.517
  Solder Side w0.203: R11A.1@-28.03,8.2 -26.8,8.2 C4A.2@-26.5,8.5
ADC_CH0: J13.37 R1.1 R3.2 | length 7.1
  Component Side w0.152: R1.1@-0.065,4.996 R3.2@0.874,4.996 0.874,6.869 -0.04,7.783 -0.04,9.402 0.16,9.603 J13.37@1.3,9.603
ADC_CH1: J13.38 R2.1 R4.2 | length 7
  Component Side w0.152: J13.38@-2.3,9.603 -1.306,9.603 -0.65,8.946 -0.65,6.101 -1.005,5.745 R2.1@-1.005,4.996 R4.2@-1.945,4.996
ADC_CH2: J13.39 R5.2 R7.1 | length 5.8
  Component Side w0.152: J13.39@1.3,8.968 1.234,8.902 1.234,5.636 1.461,5.409 1.461,5.085 1.514,5.033 1.514,5.016 R7.1@2,4.53 R5.2@2,3.47
ADC_CH3: J13.40 R6.2 R8.1 | length 6.4
  Component Side w0.152: R6.2@-3,2.97 -3,3.943 R8.1@-3.088,4.031 -2.504,4.615 -2.504,5.618 -2.3,5.822 J13.40@-2.3,8.968
DAC1_OUT_N: J9.1 TR1B.4 | length 3.9
  Component Side w0.203: TR1B.4@-24.86,4.77 -23.215,4.77 -22.05,5.935 J9.1@-22.05,6.5
DAC1_OUT_P: J7.1 TR1B.6 | length 3.9
  Component Side w0.203: TR1B.6@-24.86,2.23 -23.185,2.23 -22.05,1.095 J7.1@-22.05,0.5
DAC2_OUT_N: J12.1 TR1A.4 | length 2.8
  Component Side w0.203: TR1A.4@-23.91,25.27 -23.416,25.27 -22.05,26.636 J12.1@-22.05,27
DAC2_OUT_P: J10.1 TR1A.6 | length 3.2
  Component Side w0.203: TR1A.6@-23.91,22.73 -23.4,22.73 -22.05,21.38 J10.1@-22.05,21 J10.1@-22.43,21
GND: C1A.1 C1B.1 C2A.1 C2B.1 C3A.1 C3B.1 C6A.1 C6B.1 C7A.1 C7B.1 C8A.1 C8B.1 C9A.1 C9B.1 C10.1 C11.1 C12.1 C25.1 C26.1 C27.1 IC1.9 IC1.18 IC1.23 IC2A.17 IC2B.17 IC3.2 IC4.4 IC4.5 IC4.6 IC4.7 IC5.9 IC5.23 IC6.3 IC6.6 IC6.9 IC7.1 J7.2 J8.2 J9.2 J10.2 J11.2 J12.2 J13.1 J13.2 J13.23 J13.24 J13.29 J13.30 J13.35 J13.36 J16.2 J17.2 J18.2 J19.2 J20.2 J21.2 J22.2 J23.2 R3.1 R4.1 R13A.1 R13B.1 R16A.1 R16B.1 R44.2 R45.2 R48.2 R49.2 R50.2 R51.2 R52.2 R53.2 R54.2 R55.2 SW1.3 SW1.4 SW2.9 SW2.10 SW2.11 SW2.12 SW2.13 SW2.14 SW2.15 SW2.16 T3.2 T4.2 T5.2 T6.2 T7.2 T8.2 T9.2 T10.2 T11.2 T12.2 TR1A.3 TR1B.3 | length 83.3
  Component Side w0.152: v1(-57.654,8.656) v1@-57.596,8.714
  Component Side w0.381: v1@-33.047,12.539 v1(-33.02,12.539) ; v1(-28.648,25.27) TR1A.3@-27.09,25.27 ; TR1B.3@-28.04,4.77 v1(-26.796,4.77) ; IC3.2@-18.171,13.467 v1(-17.261,13.467) ; -16.677,2.926 -16.702,2.901 -16.652,2.85 ; IC6.3@-11.865,-0.15 -11.865,1.865 IC6.9@-12.5,2.5 -11.865,3.135 IC6.6@-11.865,5.15 ; J23.2@-10.225,12.756 v2(-10.217,12.747) ; J23.2@-10.175,8.065 J23.2@-10.09,8.15 ; IC7.1@-6.8,0.95 -6,0.95 -5.628,0.578 v1(-5.628,-0.046) ; J16.2@-4.18,24.846 J16.2@-4.001,24.846 ; v1(-3.647,12.299) -3.583,12.235 -2.392,12.235 J13.30@-2.3,12.143 v1(-1.11,12.143) ; v1(-3.545,10.013) -3.412,10.145 -2.392,10.145 J13.36@-2.3,10.238 v1(-1.16,10.238) ; v1@-3.386,21.519 -3.1,21.233 -2.5,21.233 J13.2@-2.3,21.033 v1(-1.263,21.033) ; J13.24@-2.3,14.048 v1(-1.06,14.048) ; v1(-1.945,3.409) R4.1@-1.945,4.056 ; v1(0.189,14.026) 1.278,14.026 J13.23@1.3,14.048 ; v1(0.21,12.143) J13.29@1.3,12.143 ; v1(0.214,10.165) 1.227,10.165 J13.35@1.3,10.238 ; v1(0.69,21.69) 0.69,21.042 0.7,21.033 J13.1@1.3,21.033 1.64,21.033 1.865,21.258 v1(1.865,21.62) ; v1(0.874,3.409) R3.1@0.874,4.056
  Solder Side w0.152: v1(-65.724,15.296) -65.724,15.143 -65.699,15.118 R49.2@-65.699,14.47 ; IC5.9@-58.517,8.942 -57.963,8.942 v1@-57.688,8.666 ; v1(-13.934,27.539) -13.879,27.539 v1@-13.856,27.562 ; v1(-13.862,21.615) -13.822,21.655 -13.822,22.729 IC1.9@-13.862,22.769 ; -13.7,27.406 -13.362,27.068 IC1.23@-13.362,26.669
  Solder Side w0.254: R45.2@-75.097,13.861 -73.91,13.861 T5.2@-73.736,13.686 ; v1(-72.963,11.435) -72.963,13.139 v1(-72.671,13.431) ; v1(-63.337,9.581) -63.21,9.454 -62.557,9.454 IC5.23@-62.544,9.467 ; T8.2@-59.537,13.742 -59.04,13.742 -58.854,13.556 R51.2@-58.854,12.476 ; T9.2@-55.941,13.76 -55.941,12.967 R52.2@-55.399,12.426 ; T10.2@-52.247,13.716 -52.247,12.956 R53.2@-51.691,12.4 ; v1(-16.159,27.266) -16.159,27.219 -16.448,26.929 -16.448,26.079 -16.338,25.969 IC1.18@-16.062,25.969 ; C10.1@-12.442,27.767 -12.392,27.716 v1(-11.622,27.716)
  Solder Side w0.381: v1(-68.239,9.708) -68.239,8.933 R44.2@-68.15,8.844 ; C12.1@-63.54,9.021 -63.337,9.224 v1(-63.337,9.581) ; v1(-48.325,9.505) -48.092,9.738 IC4.6@-47.223,9.738 ; R54.2@-47.957,12.349 -47.957,13.403 v1(-47.894,13.467) ; IC4.5@-47.223,9.088 IC4.6@-47.223,9.738 ; IC4.7@-47.223,10.388 IC4.6@-47.223,9.738 ; T12.2@-44.805,13.691 -44.274,13.16 R55.2@-44.274,12.324 ; v1(-43.89,9.088) IC4.4@-42.823,9.088 ; v1(-41.264,9.047) -41.112,9.2 R13A.1@-40.47,9.2 ; v1(-41.254,6.7) R16A.1@-40.47,6.7 ; R16B.1@-40.5,17.5 -40.5,17.271 v1(-40.093,16.864) ; R13B.1@-40.5,20 v1(-40.5,20.653) ; v1(-34.228,3.713) -34.215,3.7 C9A.1@-33.45,3.7 C7A.1@-33.45,4.7 ; v1(-34.11,14.5) C9B.1@-33.48,14.5 ; C7B.1@-33.48,15.5 v1(-33.48,16.3) ; v1(-33.48,20.847) C3B.1@-33.48,21.5 C1B.1@-33.48,22.5 -33.48,23.486 v1(-33.441,23.525) ; v1(-33.45,10.047) C3A.1@-33.45,10.7 ; C1A.1@-33.45,11.7 -33.45,12.308 -33.218,12.539 v1(-33.02,12.539) ; C2B.1@-31.231,23.843 v1(-31.231,24.922) ; v1(-29.7,3.3) C8A.1@-29.7,4.2 ; C8B.1@-29.669,14.712 v1(-28.793,14.712) ; C2A.1@-29.2,10.7 v1(-28.41,10.7) ; v1(-28.132,20.579) -28.132,20.052 C6B.1@-28.08,20 ; C6A.1@-28.05,9.2 -28.05,9.611 v1@-27.776,9.885 ; C27.1@-6.63,1.02 -6.63,0.956 v1(-5.628,-0.046) -5.653,-0.071 v1(-5.653,-0.986) ; v1@0.168,14.026 v1(0.189,14.026)
  Solder Side w0.508: T7.2@-63.231,13.76 -63.231,14.476 v1(-62.64,15.067) -62.487,15.22 v1(-62.041,15.22) v1(-61.508,15.22) v1(-61,15.22) v1(-60.492,15.22) v1(-59.984,15.22) v1(-59.476,15.22) ; T8.2@-59.537,13.742 v1@-59.537,15.077 ; T9.2@-55.941,13.76 -55.941,14.476 v1(-55.35,15.067) -55.197,15.22 v1(-54.752,15.22) v1(-54.218,15.22) v1(-53.71,15.22) v1(-53.202,15.22) v1(-52.694,15.22) -52.389,15.22 -52.247,15.077 T10.2@-52.247,13.716
  Solder Side w0.762: -45.785,14.813 -44.805,13.833 T12.2@-44.805,13.691
  other v1: -5.628,-0.528 -9.819,0.742 -9.819,1.224 -9.819,1.707 -11.445,1.758 -12.511,1.808 -13.451,1.834 -13,2.5 -12,2.5 -13.477,3.002 -12.562,3.053 -11.419,3.053 -31.968,7.244 -31.079,7.244 -31.104,7.701 -31.968,7.752 -27.777,9.886 -19.827,9.962 -18.277,9.987 -72.95,10.942 -72.442,10.942 -63.388,11.308 -62.803,11.308 -72.455,11.435 -69.928,11.704 -15.661,11.74 -63.388,11.791 -62.829,11.791 -69.941,12.197 -63.388,12.299 -73.954,12.375 -69.941,12.68 -69.941,13.162 -74.411,13.416 -73.179,13.431 -47.411,13.467 -74.424,13.909 -73.192,13.924 -72.684,13.924 -47.894,13.95 -47.411,13.95 -47.868,14.458 -47.386,14.458 -46.852,14.839 -46.395,14.839 -47.868,14.94 -47.386,14.94 -52.186,15.22 -15.559,16.363 -15.519,17.069 -31.079,18.064 -31.892,18.115 -31.841,18.623 -31.13,18.649 -10.657,21.062 -9.895,21.087 -3.19,21.443 -9.87,21.747 -3.063,23.221
  other v2: -18.923,-0.813 -20.142,-0.483 -17.45,0.5 -20.18,1.5 -62.865,1.753 -17.555,1.883 -18.872,2.108 -47.579,2.444 -54.915,2.667 -83.134,2.972 -35.763,2.997 -71.78,3.759 -76.098,3.785 -78.588,3.835 -7.722,3.835 -5.283,3.886 -37.084,4.089 -84.353,4.115 -54.991,4.369 -63.119,4.597 -38.938,4.623 -7.95,4.724 -47.523,4.826 -5.156,4.877 -18.466,5.055 -80.645,5.283 -75.997,5.283 -71.78,5.283 -20.117,5.41 -37.465,5.537 -7.544,5.588 -5.588,5.664 -17.628,5.791 -7.468,6.477 -16.9,6.5 -42.951,6.655 -24.841,6.655 -45.364,6.782 -19.787,7.798 -18.567,8.026 -44.399,8.263 -20.599,8.484 -17.6,8.578 -7.443,8.736 -7.442,9.423 -5.41,9.55 -11.176,9.627 -13.818,9.855 -7.849,10.262 -5.08,10.592 -10.754,10.776 -14.808,11.074 -7.722,11.227 -5.639,11.659 -7.137,11.76 -14.732,12.725 -5.893,15.57 -7.366,15.723 -13.487,15.926 -26.137,16.205 -11.278,16.231 -5.131,16.383 -29.845,16.586 -8.026,16.764 -13.894,16.967 -17.907,17.475 -22.835,17.501 -11.125,17.551 -5.156,17.653 -13.487,18.009 -7.645,18.034 -12.04,18.44 -7.391,18.999 -22.504,19.583 -18.288,19.736 -20.121,19.898 -43.51,19.964 -42.342,20.803 -17.45,21 -7.417,21.057 -44.831,21.082 -78.156,21.107 -66.142,21.107 -61.874,21.133 -71.044,21.158 -56.871,21.184 -48.819,21.184 -29.667,21.539 -82.474,21.615 -26.238,21.615 -5.74,21.615 -20.121,22.091 -7.645,22.098 -17.907,22.225 -19.279,22.53 -43.993,22.708 -83.185,22.936 -8.001,22.936 -80.467,23.368 -66.116,23.393 -50.724,23.393 -79.4,23.419 -71.018,23.419 -61.635,23.501 -56.794,23.495 -7.747,23.825 -6.883,24.409 -19.228,25.451 -18.39,25.476 -20.269,25.857 -20.121,28.091 -18.059,28.27 -19.126,28.55
LO_IN_N: J22.1 R17.2 | length 2.8
  Solder Side w0.203: R17.2@-12.486,14.242 -12.486,16.997 J22.1@-12.483,17
LO_IN_P: J23.1 R17.1 | length 2.8
  Solder Side w0.203: R17.1@-12.486,13.302 -12.486,10.502 J23.1@-12.483,10.5
MEZZ_IO0: IC1.1 J13.3 | length 22.3
  Component Side w0.152: v1(-11.419,26.421) -11.144,26.696 -11.144,28.322 -10.153,29.313 -3.44,29.313 -2.479,28.352 -2.479,25.314 0.212,22.624 0.212,20.797 0.612,20.398 J13.3@1.3,20.398
  Solder Side w0.152: IC1.1@-12.162,25.969 -11.871,25.969 v1(-11.419,26.421)
MEZZ_IO1: IC1.2 J13.4 | length 17.3
  Component Side w0.152: v1(-11.927,26.878) -11.927,26.243 -11.343,25.659 v1(-11.368,25.634) ; v1(-3.44,20.398) J13.4@-2.3,20.398
  Solder Side w0.152: IC1.2@-12.162,25.469 -11.533,25.469 v1(-11.368,25.634) ; v1(-11.927,26.878) -11.906,26.9 -11.221,26.9 -11.034,26.713 -5.564,26.713 -4.307,25.456 -4.307,25.153 -3.541,24.386 -3.541,21.836 -3.685,21.692 -3.685,21.261 -3.44,21.016 v1(-3.44,20.398)
MEZZ_IO2: IC1.3 J13.5 | length 23.4
  Component Side w0.152: v1(-10.865,26.053) -10.839,26.079 -10.839,27.839 -9.671,29.008 -3.567,29.008 -2.783,28.225 -2.783,25.188 -0.093,22.498 -0.093,20.436 0.581,19.763 J13.5@1.3,19.763
  Solder Side w0.152: IC1.3@-12.162,24.969 -11.245,24.969 -10.865,25.35 v1(-10.865,26.053)
MEZZ_IO3: IC1.4 J13.6 | length 16.1
  Component Side w0.152: v1(-3.494,19.741) -2.322,19.741 J13.6@-2.3,19.763
  Solder Side w0.152: IC1.4@-12.162,24.469 -12.144,24.487 -11.245,24.487 -9.362,26.37 -5.661,26.37 -4.612,25.322 -4.612,25.026 -3.846,24.26 -3.846,21.962 -3.99,21.819 -3.99,20.236 v1(-3.494,19.741)
MEZZ_IO4: IC1.5 J13.7 | length 24
  Component Side w0.152: v1(-11.292,24.008) -11.292,24.969 -11.272,24.969 -10.386,25.854 -10.386,27.606 -9.29,28.703 -3.77,28.703 -3.088,28.021 -3.088,25.062 -0.398,22.371 -0.398,20.159 0.271,19.49 0.271,19.468 0.612,19.128 J13.7@1.3,19.128
  Solder Side w0.152: IC1.5@-12.162,23.969 -11.331,23.969 v1(-11.292,24.008)
MEZZ_IO5: IC1.6 J13.8 | length 16.9
  Component Side w0.152: v1(-3.494,19.08) -2.347,19.08 J13.8@-2.3,19.128
  Solder Side w0.152: IC1.6@-12.162,23.469 -11.12,23.469 -10.606,23.983 -10.606,24.338 -8.981,25.964 -5.685,25.964 -4.917,25.195 -4.917,24.9 -4.151,24.134 -4.151,22.089 -4.294,21.945 -4.294,19.864 -3.511,19.08 v1(-3.494,19.08)
MEZZ_IO6: IC1.7 J13.9 | length 25.5
  Component Side w0.152: v1(-12.098,22.719) -11.743,22.719 -10.759,23.703 -10.759,25.049 -10.081,25.727 -10.081,27.378 -9.061,28.398 -3.973,28.398 -3.393,27.818 -3.393,24.936 -0.703,22.245 -0.703,19.762 0.567,18.493 J13.9@1.3,18.493
  Solder Side w0.152: IC1.7@-12.862,22.769 -12.812,22.719 v1(-12.098,22.719)
MEZZ_IO7: IC1.8 J13.10 | length 19.6
  Component Side w0.152: v1(-3.494,18.42) -2.372,18.42 J13.10@-2.3,18.493
  Solder Side w0.152: IC1.8@-13.362,22.769 -13.362,22.23 -13.158,22.027 -12.045,22.027 -11.897,22.175 -11.576,22.175 -9.895,23.856 -9.895,24.541 -8.778,25.659 -5.828,25.659 -5.222,25.053 -5.222,24.774 -4.456,24.008 -4.456,22.215 -4.599,22.071 -4.599,19.508 -3.693,18.602 -3.676,18.602 v1(-3.494,18.42)
MEZZ_IO8: IC1.10 J13.11 | length 28.8
  Component Side w0.152: v1(-14.3,22.123) -14.3,22.118 -14.324,22.094 -11.978,22.094 -11.897,22.175 -11.753,22.175 -10.352,23.576 -10.352,24.973 -9.717,25.608 -9.717,27.132 -8.93,27.92 v1(-4.358,27.92) ; v1(0.16,17.858) J13.11@1.3,17.858
  Solder Side w0.152: IC1.10@-14.362,22.769 -14.362,22.099 -14.337,22.123 v1(-14.3,22.123) ; v1(-4.358,27.92) -4.354,27.916 -3.414,27.916 -2.479,26.98 -2.479,25.973 -1.027,24.521 -0.553,24.521 0.16,23.808 v1(0.16,17.858)
MEZZ_IO9: IC1.11 J13.12 | length 22.2
  Component Side w0.152: v1(-3.494,17.76) -2.398,17.76 J13.12@-2.3,17.858
  Solder Side w0.152: IC1.11@-14.862,22.769 -14.862,21.922 -14.703,21.764 -14.635,21.764 -14.355,21.483 -14.355,21.416 -14.228,21.289 -14.076,21.137 -13.663,21.137 -13.103,21.697 -11.944,21.697 -11.771,21.87 -11.372,21.87 -9.489,23.754 -9.489,24.389 -8.524,25.354 -5.955,25.354 -5.527,24.926 -5.527,24.648 -4.76,23.881 -4.76,22.341 -4.904,22.197 -4.904,19.382 -4.559,19.037 -4.559,18.773 -3.545,17.76 v1(-3.494,17.76)
MEZZ_IO10: IC1.12 J13.13 | length 30.5
  Component Side w0.152: v3(-14.834,21.285) -14.21,21.285 -14.209,21.286 -14.06,21.137 -13.663,21.137 -13.158,21.642 -11.999,21.642 -11.771,21.87 -11.525,21.87 -9.971,23.424 -9.971,24.922 -9.362,25.532 -9.362,26.65 -8.574,27.437 v1(-3.875,27.437) ; v1(0.036,17.201) 1.278,17.201 J13.13@1.3,17.223
  Solder Side w0.152: IC1.12@-15.362,22.769 -15.362,21.889 -14.834,21.361 v3(-14.834,21.285) ; v1(-3.875,27.437) -3.415,26.977 -3.314,26.977 -2.783,26.446 -2.783,25.847 -1.153,24.217 -0.68,24.217 -0.167,23.704 -0.167,18.207 -0.318,18.056 -0.318,17.555 v1(0.036,17.201)
MEZZ_IO11: IC1.13 J13.14 | length 24.8
  Component Side w0.152: v3(-14.757,20.625) -14.575,20.808 -13.391,20.808 -12.862,21.337 -11.627,21.337 v3(-11.572,21.392) ; v1@-3.44,17.223 J13.14@-2.3,17.223
  Solder Side w0.152: IC1.13@-16.062,23.469 -16.062,21.716 -15.461,21.115 -15.408,21.115 -15.1,20.807 -14.888,20.807 -14.757,20.676 v3(-14.757,20.625) ; v3(-11.572,21.392) -11.241,21.392 -9.006,23.627 -9.006,24.375 -8.338,25.043 -6.108,25.043 -5.831,24.766 -5.831,24.521 -5.065,23.755 -5.065,22.467 -5.209,22.324 -5.209,19.256 -4.95,18.997 -4.95,18.538 -3.693,17.281 -3.676,17.281 v1(-3.494,17.099)
MEZZ_IO12: IC1.14 J13.15 | length 34.1
  Component Side w0.152: v1(-0.015,16.54) 1.253,16.54 J13.15@1.3,16.588
  Solder Side w0.152: IC1.14@-16.062,23.969 -16.638,23.969 -17.845,25.176 -17.845,27.666 -16.071,29.44 -11.339,29.44 -9.857,27.958 -5.082,27.958 -3.088,25.964 -3.088,25.721 -1.279,23.912 -0.837,23.912 -0.479,23.554 -0.479,18.488 -0.65,18.318 -0.65,17.175 v1(-0.015,16.54)
MEZZ_IO13: IC1.15 J13.16 | length 32.1
  Component Side w0.152: v1(-15.737,28.961) -15.737,27.767 v1(-15.661,27.691) ; v1@-3.396,16.588 J13.16@-2.3,16.588
  Solder Side w0.152: IC1.15@-16.062,24.469 -16.626,24.469 -17.515,25.358 -17.515,27.523 -16.077,28.961 v1(-15.737,28.961) ; v1@-15.661,27.666 -15.449,27.666 -14.611,28.504 -11.696,28.504 -10.21,27.018 -5.438,27.018 -5.057,26.637 ; -5.056,26.637 -4.003,25.583 -4.003,25.279 -2.584,23.86 -2.584,17.324 v1(-3.469,16.439)
MEZZ_IO14: IC1.16 J13.17 | length 33.5
  Component Side w0.152: v1(-0.954,16.803) -0.167,16.016 J13.17@1.092,16.016
  Solder Side w0.152: IC1.16@-16.062,24.969 -16.652,24.969 -17.185,25.503 -17.185,27.422 -16.125,28.482 -15.529,28.482 -14.898,29.113 -11.444,29.113 -9.971,27.64 -5.196,27.64 -3.393,25.837 -3.393,25.595 -1.405,23.607 -1.239,23.607 -0.784,23.152 -0.784,18.615 -0.954,18.445 v1(-0.954,16.803) -0.213,16.062 ; -0.213,16.062 -0.01,16.062 0.071,15.982 -0.031,15.88 -0.213,16.062
MEZZ_IO15: IC1.17 J13.18 | length 29.8
  Component Side w0.152: v1(-3.469,15.753) -3.269,15.953 J13.18@-2.3,15.953
  Solder Side w0.152: IC1.17@-16.062,25.469 -16.626,25.469 -16.804,25.647 -16.804,27.372 -15.999,28.178 -15.403,28.178 -14.772,28.809 -11.57,28.809 -10.097,27.335 -5.323,27.335 -3.698,25.71 -3.698,25.405 -2.279,23.987 -2.279,16.943 v1(-3.469,15.753)
N5V0A: C7A.2 C7B.2 C8A.2 C8B.2 C9A.2 C9B.2 C27.2 IC2A.13 IC2A.14 IC2A.15 IC2A.16 IC2B.13 IC2B.14 IC2B.15 IC2B.16 IC7.5 | length 78
  Component Side w0.305: v1(-28.158,6.076) -28.035,5.953 -27.293,5.953 -26.968,6.278 -26.968,6.432 -24.581,8.819 -22.379,8.819 -21.554,9.644 -21.554,10.775 -23.84,13.061 -23.84,13.848 v1(-25.211,15.22) ; IC7.5@-4.2,0.95 -4,0.75 v1(-4,0)
  Solder Side w0.305: IC2B.16@-32.28,17.05 -32.28,16.127 ; IC2A.16@-32.25,6.25 -32.298,6.202 -32.298,5.314 ; IC2B.15@-31.78,17.05 -31.78,16.175 -31.765,16.159 ; IC2A.15@-31.75,6.25 -31.75,5.328 -31.765,5.314 ; C8A.2@-31.3,4.2 -31.8,3.7 C9A.2@-32.55,3.7 C7A.2@-32.55,4.7 -32.298,4.952 -32.298,5.314 ; IC2B.14@-31.28,17.05 -31.28,16.187 -31.307,16.159 ; IC2A.14@-31.25,6.25 -31.25,5.358 -31.206,5.314 ; IC2B.13@-30.78,17.05 -30.78,16.433 -31.053,16.159 -31.307,16.159 ; IC2A.13@-30.75,6.25 -30.75,5.414 -30.85,5.314 -31.206,5.314 ; -29.618,1.491 -28.158,2.951 v1(-28.158,6.076) ; v1(-25.211,15.22) -27.675,15.22 -28.158,15.702 -30.356,15.702 -31.269,14.789 C8B.2@-31.269,14.712 -31.454,14.526 -32.554,14.526 C9B.2@-32.58,14.5 C7B.2@-32.58,15.5 -32.323,15.757 -32.323,16.083 -32.28,16.127 ; C27.2@-4.85,0.85 v1(-4,0) ; -32.298,5.314 -31.765,5.314 ; -32.28,16.127 -32.247,16.159 -31.765,16.159 ; -31.765,5.314 -31.206,5.314 ; -31.765,16.159 -31.307,16.159
  Solder Side w0.381: C8A.2@-31.3,4.2 -31.3,3.173 -29.618,1.491 -26.636,-1.491 -9.433,-1.491 -9.227,-1.697 -5.297,-1.697 -4.85,-1.25 -4.85,0.85 C27.2@-4.85,1